# EAGLE board LCD (EAGLE 8.1.0)
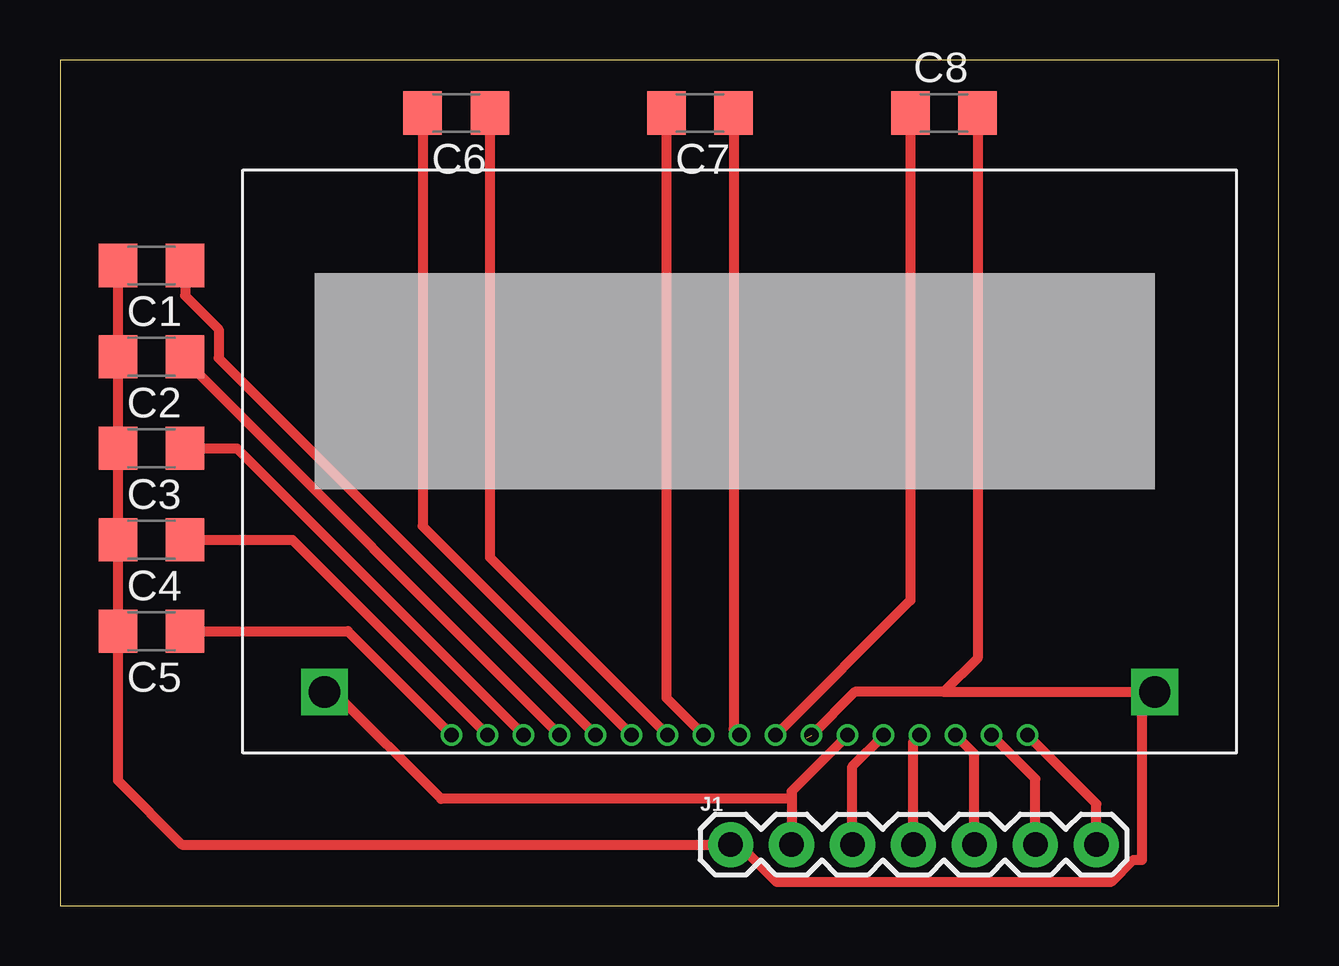
[diagram p0: board, top side]

Size 50.78 x 35.23 mm. Coordinates in mm from the lower left corner, seen from the top.
Outline: 0,0 50.78,0 50.78,35.23 0,35.23 0,0
Copper layers (1*16): Top 0.035mm / dielectric 1.5mm / Bottom 0.035mm
Design rules "OthermillDRC_1_64_v2 *": minimum track width 16mil, minimum drill 16mil, track to track 0.39878125mm, track to pad 0.39878125mm, pad to pad 0.39878125mm, via to via 0.39878125mm, smd to smd 0mil, copper to edge 0mil, drill to drill 1mil, minimum pad ring 0mil, minimum via ring 15mil, stop-mask expansion 1mil, vias tented up to drill 30mil, thermal gap 10mil

## Footprints (pad centres in the part's own frame; a part is rotated, then mirrored left to right if it is on the bottom)
C1206 = smd 1.6 x 1.8: 1 -1.4,0; 2 1.4,0
1X07 = drill 1.016 pad 1.88: 1 0,0; 2 2.54,0; 3 5.08,0; 4 7.62,0; 5 10.16,0; 6 12.7,0; 7 15.24,0
NHD-C12832A1Z = drill 1.3 square: A 3.4,2.55; K 38,2.55 | drill 0.6: A0 29.7,0.75; C1+ 19.2,0.75; C1- 20.7,0.75; C2+ 17.7,0.75; C2- 16.2,0.75; CS1 32.7,0.75; RES 31.2,0.75; SCL 28.2,0.75; SI 26.7,0.75; V0 8.7,0.75; V1 10.2,0.75; V2 11.7,0.75; V3 13.2,0.75; V4 14.7,0.75; VDD 25.2,0.75; VOUT 22.2,0.75; VSS 23.7,0.75

## Placement (x,y rotation side)
C1  1µF  [C1206]  3.81,26.67 180 top
C2  1µF  [C1206]  3.81,22.86 180 top
C3  1µF  [C1206]  3.81,19.05 180 top
C4  1µF  [C1206]  3.81,15.24 180 top
C5  1µF  [C1206]  3.81,11.43 180 top
C6  1µF  [C1206]  16.51,33.02 180 top
C7  1µF  [C1206]  26.67,33.02 180 top
C8  1µF  [C1206]  36.83,33.02 0 top
J1  [1X07]  27.94,2.54 0 top
U$1  LCD-NHD  [NHD-C12832A1Z]  7.62,6.35 0 top

## Library data of the parts
C1-C8 = rcl
J1 = SparkFun-Connectors
U$1 = NHD-C12832A1Z

## Nets
A0: J1.5 U$1.A0
CS1: J1.7 U$1.CS1
GND: C1.2 C2.2 C3.2 C4.2 C5.2 C8.2 J1.1 U$1.K U$1.VSS
N$1: C5.1 U$1.V0
N$2: C4.1 U$1.V1
N$3: C3.1 U$1.V2
N$4: C2.1 U$1.V3
N$5: C1.1 U$1.V4
N$7: C7.1 U$1.C1-
N$8: C7.2 U$1.C1+
N$9: C6.1 U$1.C2+
N$10: C6.2 U$1.C2-
RST: J1.6 U$1.RES
SCL: J1.4 U$1.SCL
SI: J1.3 U$1.SI
VDD: J1.2 U$1.A U$1.VDD
VOUT: C8.1 U$1.VOUT

## Tracks (layer width: path | path; a pad name or v marks a point on that pad's centre or on a via)
A0
  Top 0.406: J1.5 38.1,6.32 U$1.A0
CS1
  Top 0.406: J1.7 43.18,4.24 U$1.CS1
GND  (1 unrouted)
  Top 0.406: C1.2 C2.2 C3.2 C4.2 C5.2 2.41,5.21 5.08,2.54 J1.1 28.3,2.54 29.84,1 43.82,1 44.73,1.91 45.09,1.91 45.09,8.89 U$1.K 36.83,8.9 | 36.83,8.9 33.12,8.9 U$1.VSS | C8.2 38.23,10.3 36.83,8.9
N$1
  Top 0.406: C5.1 11.99,11.43 U$1.V0
N$2
  Top 0.406: C4.1 9.68,15.24 U$1.V1
N$3
  Top 0.406: C3.1 7.37,19.05 U$1.V2
N$4
  Top 0.406: C2.1 5.21,22.71 U$1.V3
N$5
  Top 0.406: U$1.V4 6.61,22.81 6.61,24.01 5.21,25.41 C1.1
N$7
  Top 0.406: C7.1 28.07,7.35 U$1.C1-
N$8
  Top 0.406: C7.2 25.27,8.65 U$1.C1+
N$9
  Top 0.406: C6.1 17.91,14.51 U$1.C2+
N$10
  Top 0.406: C6.2 15.11,15.81 U$1.C2-
RST
  Top 0.406: J1.6 40.64,5.28 U$1.RES
SCL
  Top 0.406: J1.4 35.56,6.84 U$1.SCL
SI
  Top 0.406: J1.3 33.02,5.8 U$1.SI
VDD
  Top 0.406: 30.48,4.45 30.48,4.76 U$1.VDD | 30.48,4.45 J1.2 30.12,2.54 | 30.48,4.45 15.88,4.45 11.43,8.89 U$1.A
VOUT
  Top 0.406: C8.1 35.43,12.71 U$1.VOUT